# EAGLE board untitled (EAGLE 6.3)
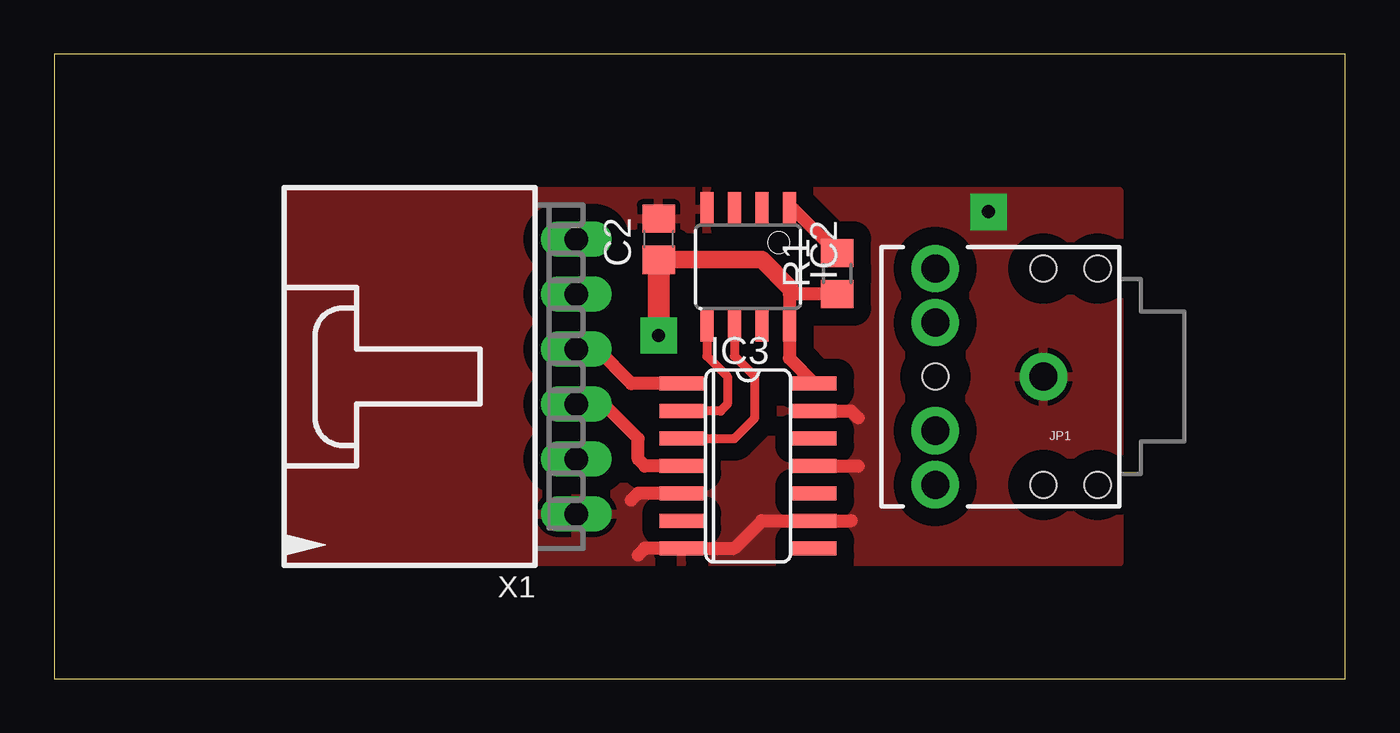
[diagram p0: board, top side]
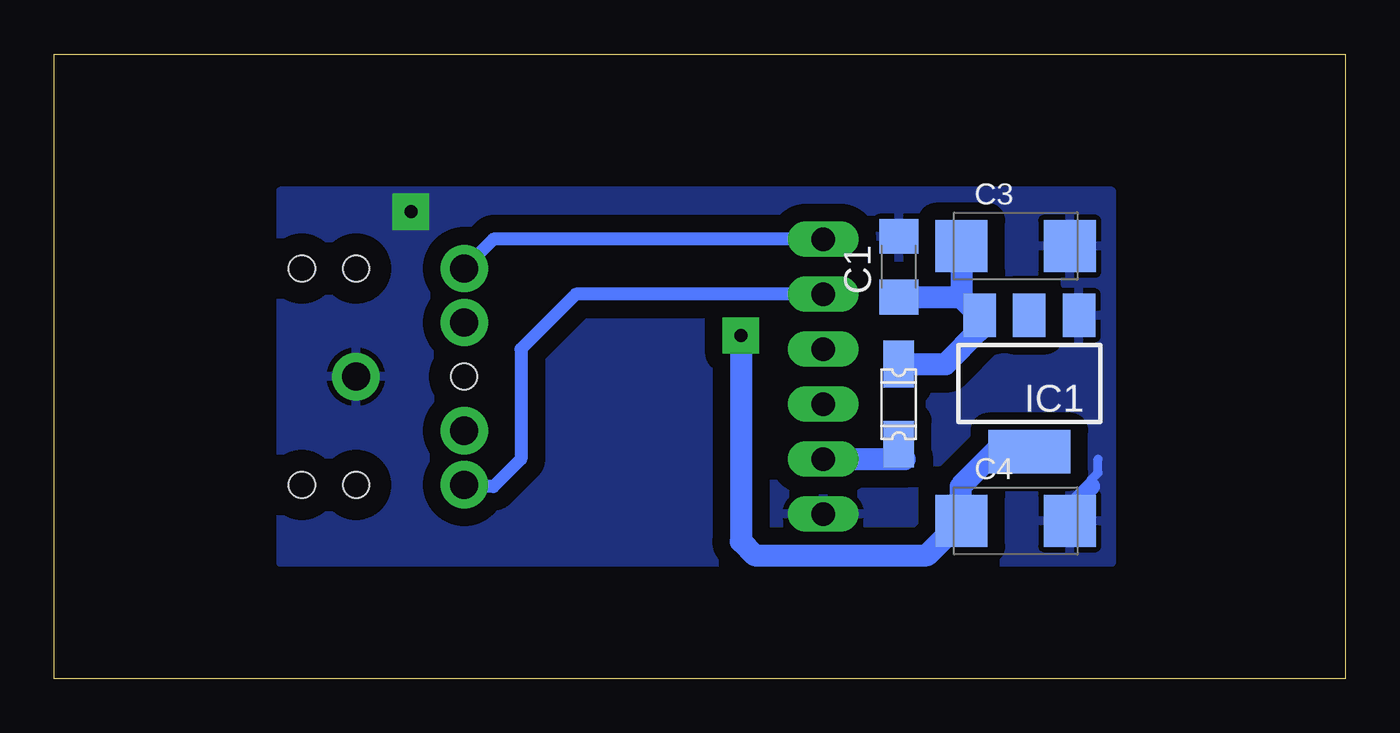
[diagram p1: board, bottom side, seen from below]

Size 59.67 x 28.88 mm. Coordinates in mm from the lower left corner, seen from the top.
Outline: 0,0 59.67,0 59.67,28.88 0,28.88 0,0
Copper layers (1*16): Top 0.035mm / dielectric 1.5mm / Bottom 0.035mm
Design rules "default": minimum track width 10mil, minimum drill 24mil, track to track 8mil, track to pad 8mil, pad to pad 8mil, via to via 8mil, smd to smd 8mil, copper to edge 40mil, drill to drill 8mil, minimum pad ring 10mil, minimum via ring 8mil, stop-mask expansion 4mil, vias tented up to drill 0mil, thermal gap 10mil

## Footprints (pad centres in the part's own frame; a part is rotated, then mirrored left to right if it is on the bottom)
C1206 = smd 1.6 x 1.8: 1 -1.4,0; 2 1.4,0
C0805 = smd 1.3 x 1.5: 1 -0.95,0; 2 0.95,0
SMC_C = smd 2.4 x 2.4: + -2.5,0; - 2.5,0
1206L = smd 2.16 x 1.4: P$1 -1.85,0; P$2 1.85,0
SOT223 = smd 1.5 x 2: 1 -2.3,-3.15; 2 0,-3.15; 3 2.3,-3.15 | smd 3.8 x 2: 4 0,3.15
8S1 = smd 0.6 x 1.6: 1 -1.905,-2.654; 2 -0.645,-2.654; 3 0.625,-2.654; 4 1.895,-2.654; 5 1.905,2.654; 6 0.635,2.654; 7 -0.635,2.654; 8 -1.905,2.654
SO14 = smd 0.66 x 2.032: 1 -3.81,-3.073; 2 -2.54,-3.073; 3 -1.27,-3.073; 4 0,-3.073; 5 1.27,-3.073; 6 2.54,-3.073; 7 3.81,-3.073; 8 3.81,3.073; 9 2.54,3.073; 10 1.27,3.073; 11 0,3.073; 12 -1.27,3.073; 13 -2.54,3.073; 14 -3.81,3.073
AUDIO-JACK = drill 1.3 pad 2.184: RING 5,5; RSH 5,2.5; SLEEVE 0,0; TIP 5,-5; TSH 5,-2.5 | hole 1.2: 0,5; -2.5,5; -2.5,-5; 0,-5; 5,0
R0805 = smd 1.3 x 1.5: 1 -0.95,0; 2 0.95,0
70553-06 = drill 1.092 long: 1 -6.35,-7.62; 2 -3.81,-7.62; 3 -1.27,-7.62; 4 1.27,-7.62; 5 3.81,-7.62; 6 6.35,-7.62

## Placement (x,y rotation side)
C1  10nF  [C1206]  20.64,19.05 90 bottom
C2  10nF  [C0805]  27.94,20.32 90 top
C3  10uF  [SMC_C]  15.24,20 0 bottom
C4  10uF  [SMC_C]  15.24,7.3 0 bottom
FUSE1  PTC 300mA  [1206L]  20.64,12.7 270 bottom
IC1  LD117AS50TR  [SOT223]  14.61,13.65 180 bottom
IC2  TINY13-20SSU  [8S1]  32.07,19.05 180 top
IC3  4069D  [SO14]  32.07,9.84 270 top
JP1  [AUDIO-JACK]  45.72,13.97 180 top
R1  10K  [R0805]  36.2,18.73 90 top
X1  C-GRID-06-70553  [70553-06]  16.51,13.97 90 top

## Library data of the parts
C1-C4 R1 = rcl_rigel
FUSE1 = ptc-littlefuse
IC1 = v-reg
IC2 = ATMEL; MPN: ATTINY13-20SSU; OC_FARNELL: 1455133; OC_NEWARK: 58M3771
IC3 = 40xx
JP1 = SparkFun-Connectors
X1 = con-molex; OC_FARNELL: unknown; OC_NEWARK: unknown

## Nets
+12V: FUSE1.P$2 X1.2
GND: C1.2 C2.2 C3.- C4.- IC1.1 IC2.4 IC3.5 IC3.7 IC3.9 IC3.11 IC3.13 JP1.SLEEVE X1.1
N$1: IC2.1 R1.2
N$3: JP1.RING X1.5
N$4: C1.1 C3.+ FUSE1.P$1 IC1.3
N$5: JP1.TIP X1.6
N$29: IC3.4 X1.3
N$30: IC3.1 X1.4
RX: IC2.5 IC3.2
TX: IC2.6 IC3.3
VCC: C2.1 C4.+ IC1.4 IC2.8 IC3.14 R1.1

## Tracks (layer width: path | path; a pad name or v marks a point on that pad's centre or on a via)
+12V
  Bottom 1.016: X1.2 20.38,10.16 FUSE1.P$2
GND  (via drill 0.6 pad 1.68)
  Top 0.61: IC3.11 37.15,9.84 | 36.83,7.3 IC3.9 32.7,7.3 31.43,6.03 IC3.7 27.3,6.03 26.99,5.71 | IC3.13 36.83,12.38 37.15,12.06 | IC3.5 26.99,8.57 26.67,8.26
  Bottom 0.406: 11.75,8.89 11.75,9.21 11.43,9.53 11.43,10.16
  Bottom 0.813: C4.- 12.74,7.9 11.75,8.89
  other vias: 43.18,21.59
  pour Bottom (isolate 0.813): 10.79,22.54 49.21,22.54 49.21,5.4 10.79,5.4
  pour Top (isolate 0.813): 10.79,22.54 49.21,22.54 49.21,5.4 10.79,5.4
N$1
  Top 0.61: R1.2 34.18,21.7 IC2.1
N$3
  Bottom 0.61: X1.5 35.56,17.78 38.1,15.24 38.1,10.16 39.37,8.89 40.64,8.89 JP1.RING
N$4
  Bottom 1.016: C3.+ 17.74,17.78 | 17.74,17.78 17.74,17.64 IC1.3 16.91,16.11 18.47,14.55 FUSE1.P$1 | C1.1 17.87,17.65 17.74,17.78
N$5
  Bottom 0.61: X1.6 39.37,20.32 JP1.TIP
N$29
  Top 0.61: IC3.4 27.3,9.84 26.99,10.16 26.99,11.11 25.4,12.7 X1.3
N$30
  Top 0.61: IC3.1 26.67,13.65 25.08,15.24 X1.4
RX
  Top 0.406: IC2.5 30.16,14.92 31.11,13.97 31.11,12.7 30.8,12.38 IC3.2
TX
  Top 0.406: IC3.3 31.43,11.11 32.38,12.06 32.38,13.97 31.43,14.92 IC2.6
VCC  (via drill 0.6 pad 1.68)
  Top 0.61: 33.97,18.1 33.97,17.78 | 33.97,17.78 IC2.8 33.97,14.82 IC3.14 | R1.1 33.98,17.78 33.97,17.78
  Top 0.813: C2.1 32.7,19.37 33.97,18.1
  Top 1.016: C2.1 v27.94,15.88
  Bottom 1.016: IC1.4 16.17,10.5 17.78,8.89 17.78,7.34 C4.+ 19.33,5.71 27.3,5.71 27.94,6.35 v27.94,15.88